# Altium PCB PCB1.PcbDoc
Units mil, origin at the board's own origin, x right, y up, seen from the top; angles counter-clockwise.
Board outline 6960 x 4750 mil, 4 copper layers (Top Layer 1, Top Layer, Bottom Layer, Bottom Layer 1), stack 23.756 mil thick; 113 components, 62 nets, 306 pads, 50 vias.
Unrouted connection lines stored in the file: 48.
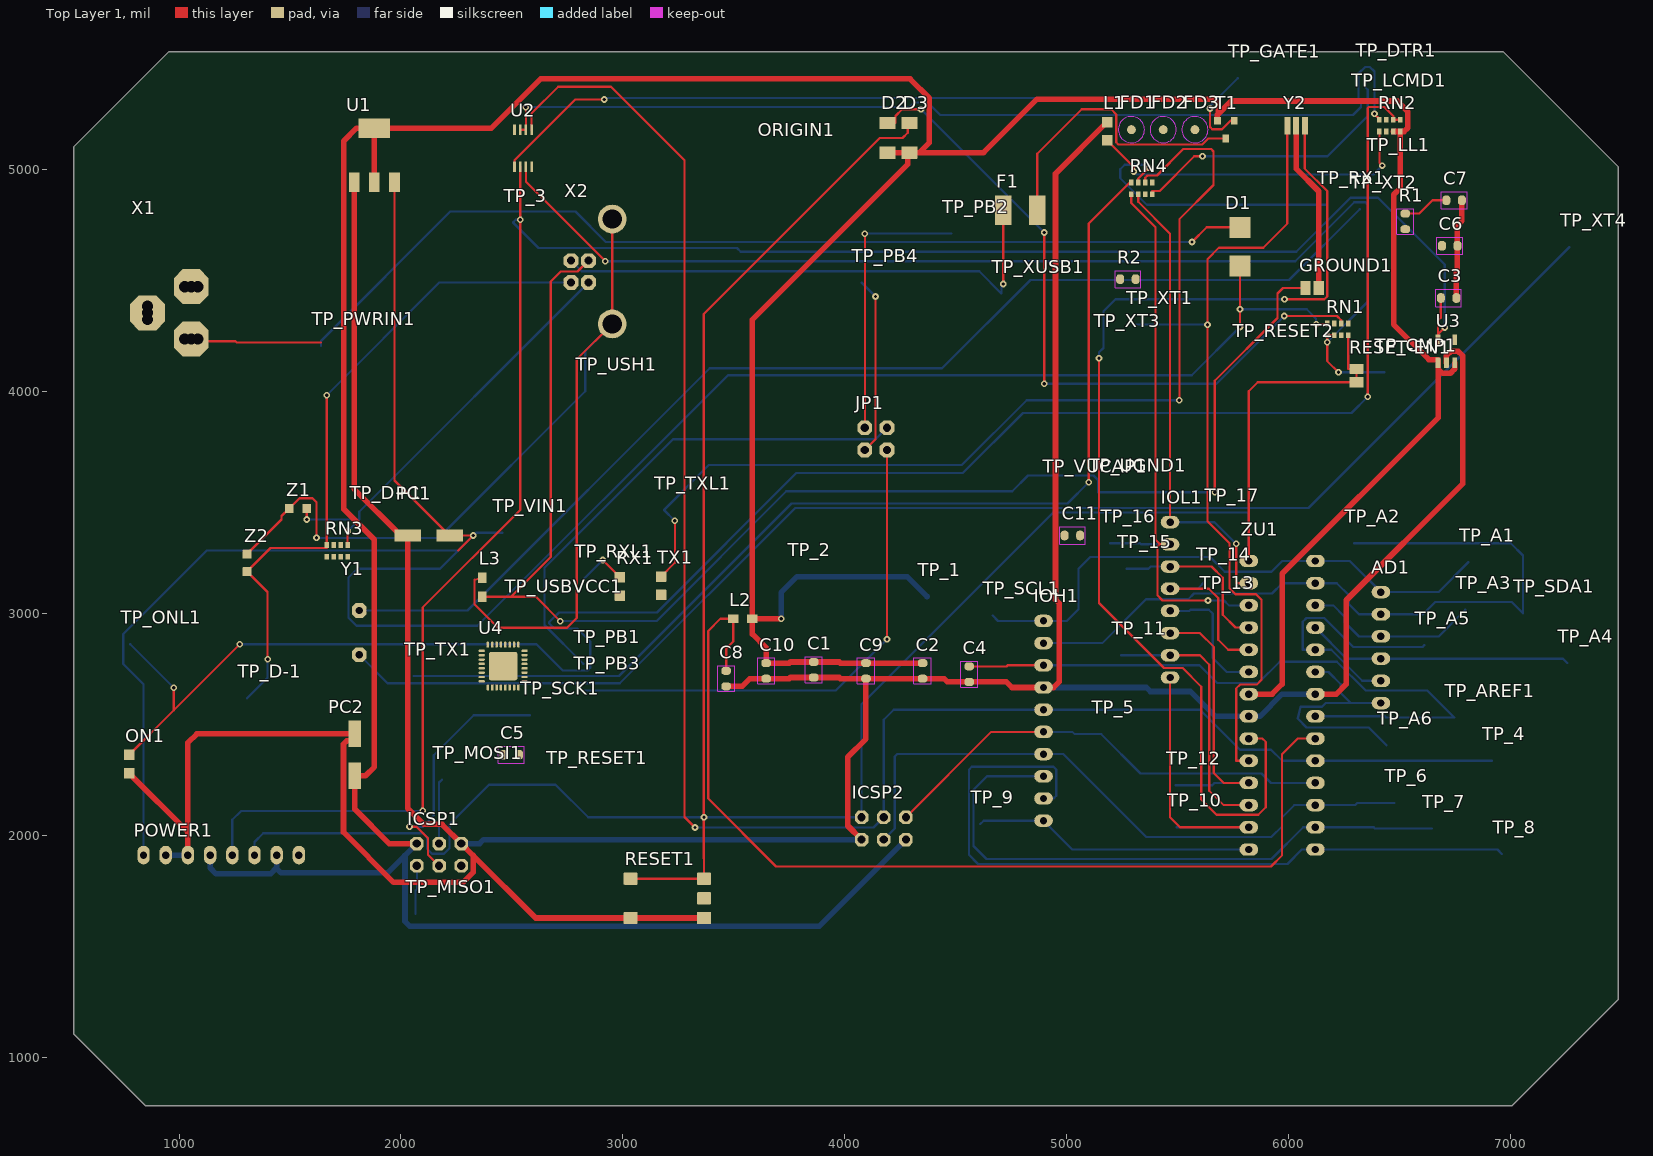
[diagram p0: Top Layer 1 view]
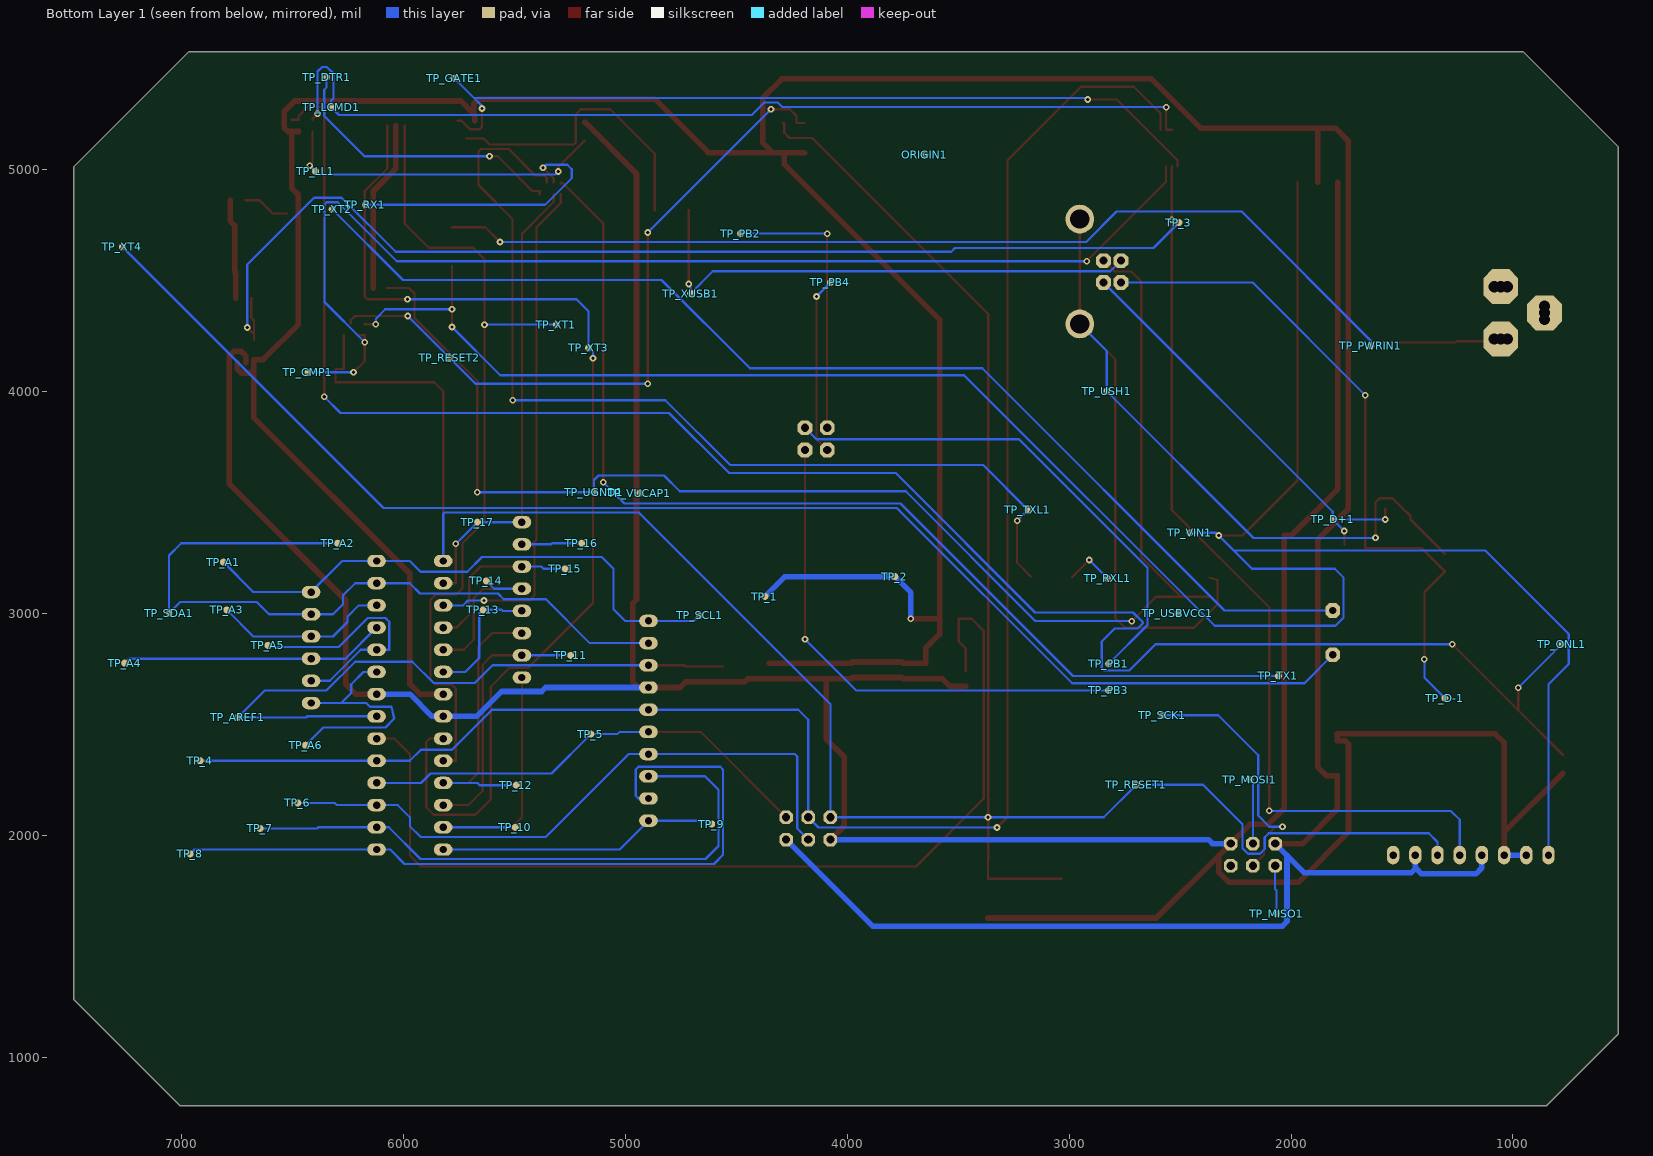
[diagram p1: Bottom Layer 1 view, seen from below]
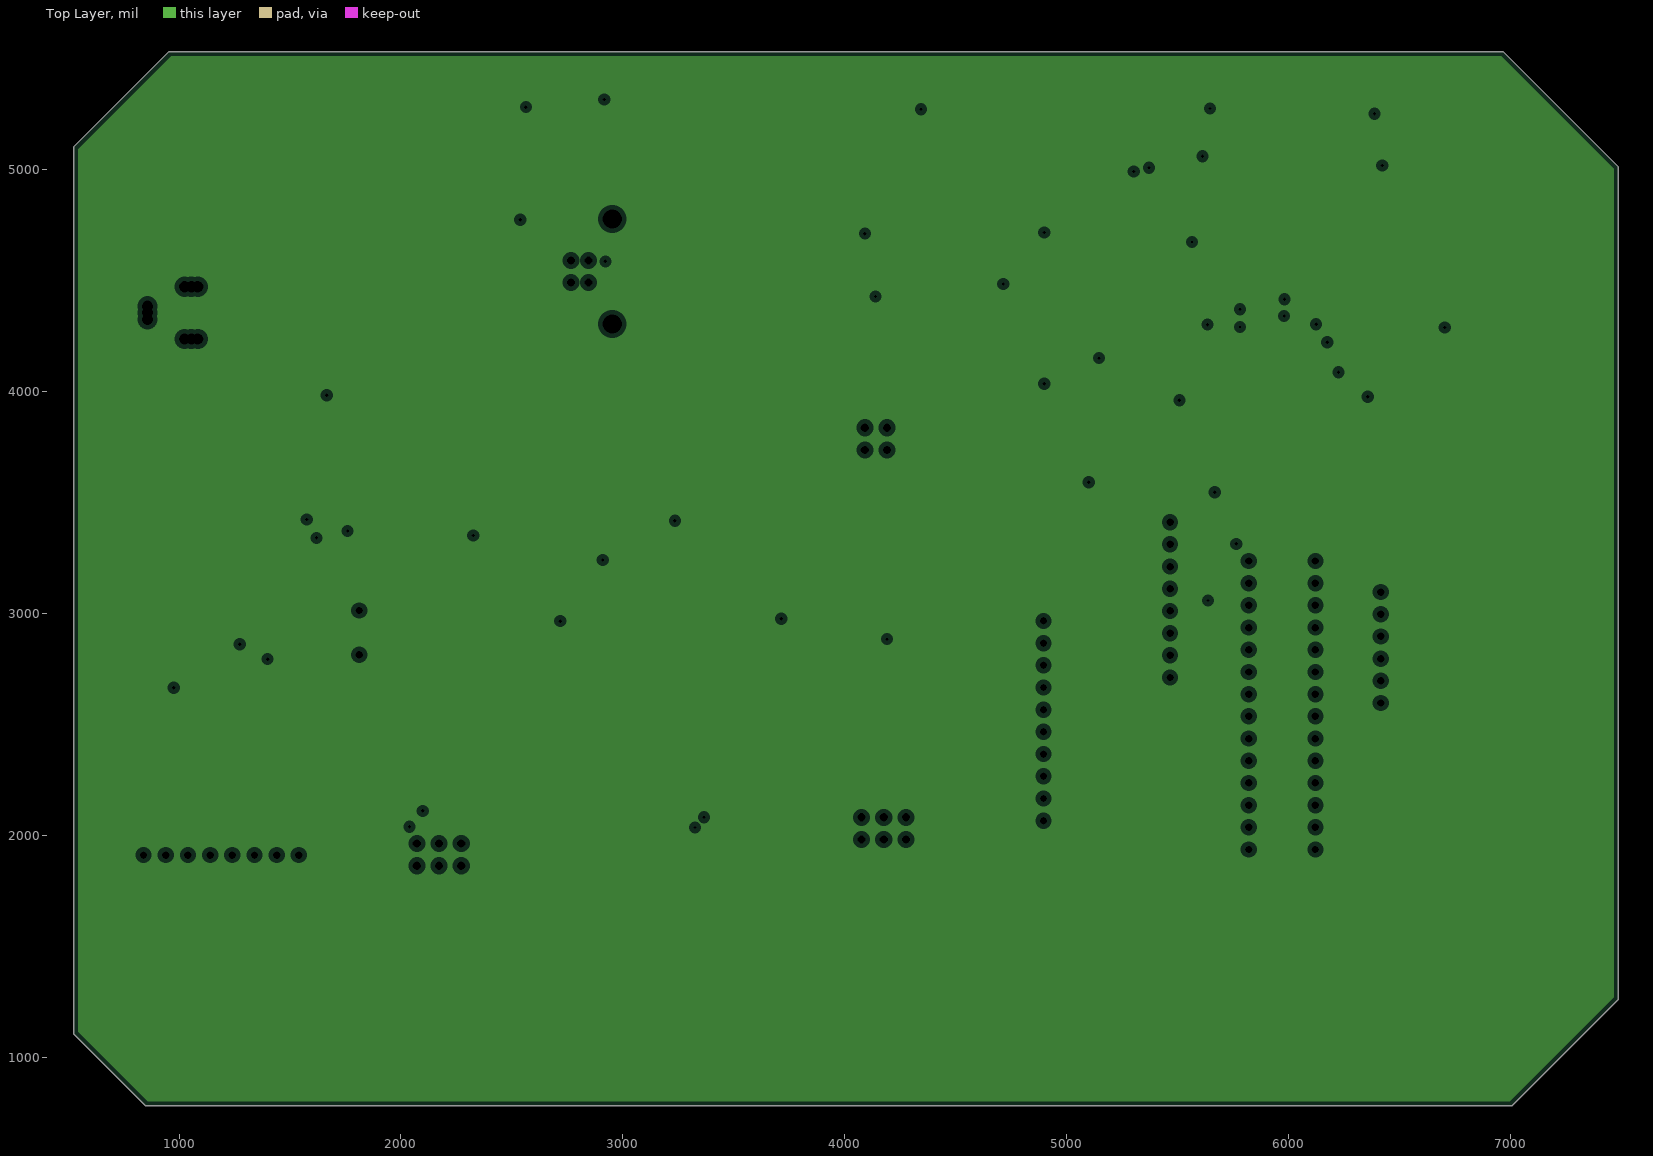
[diagram p2: Top Layer, clearances drawn from the general rule]
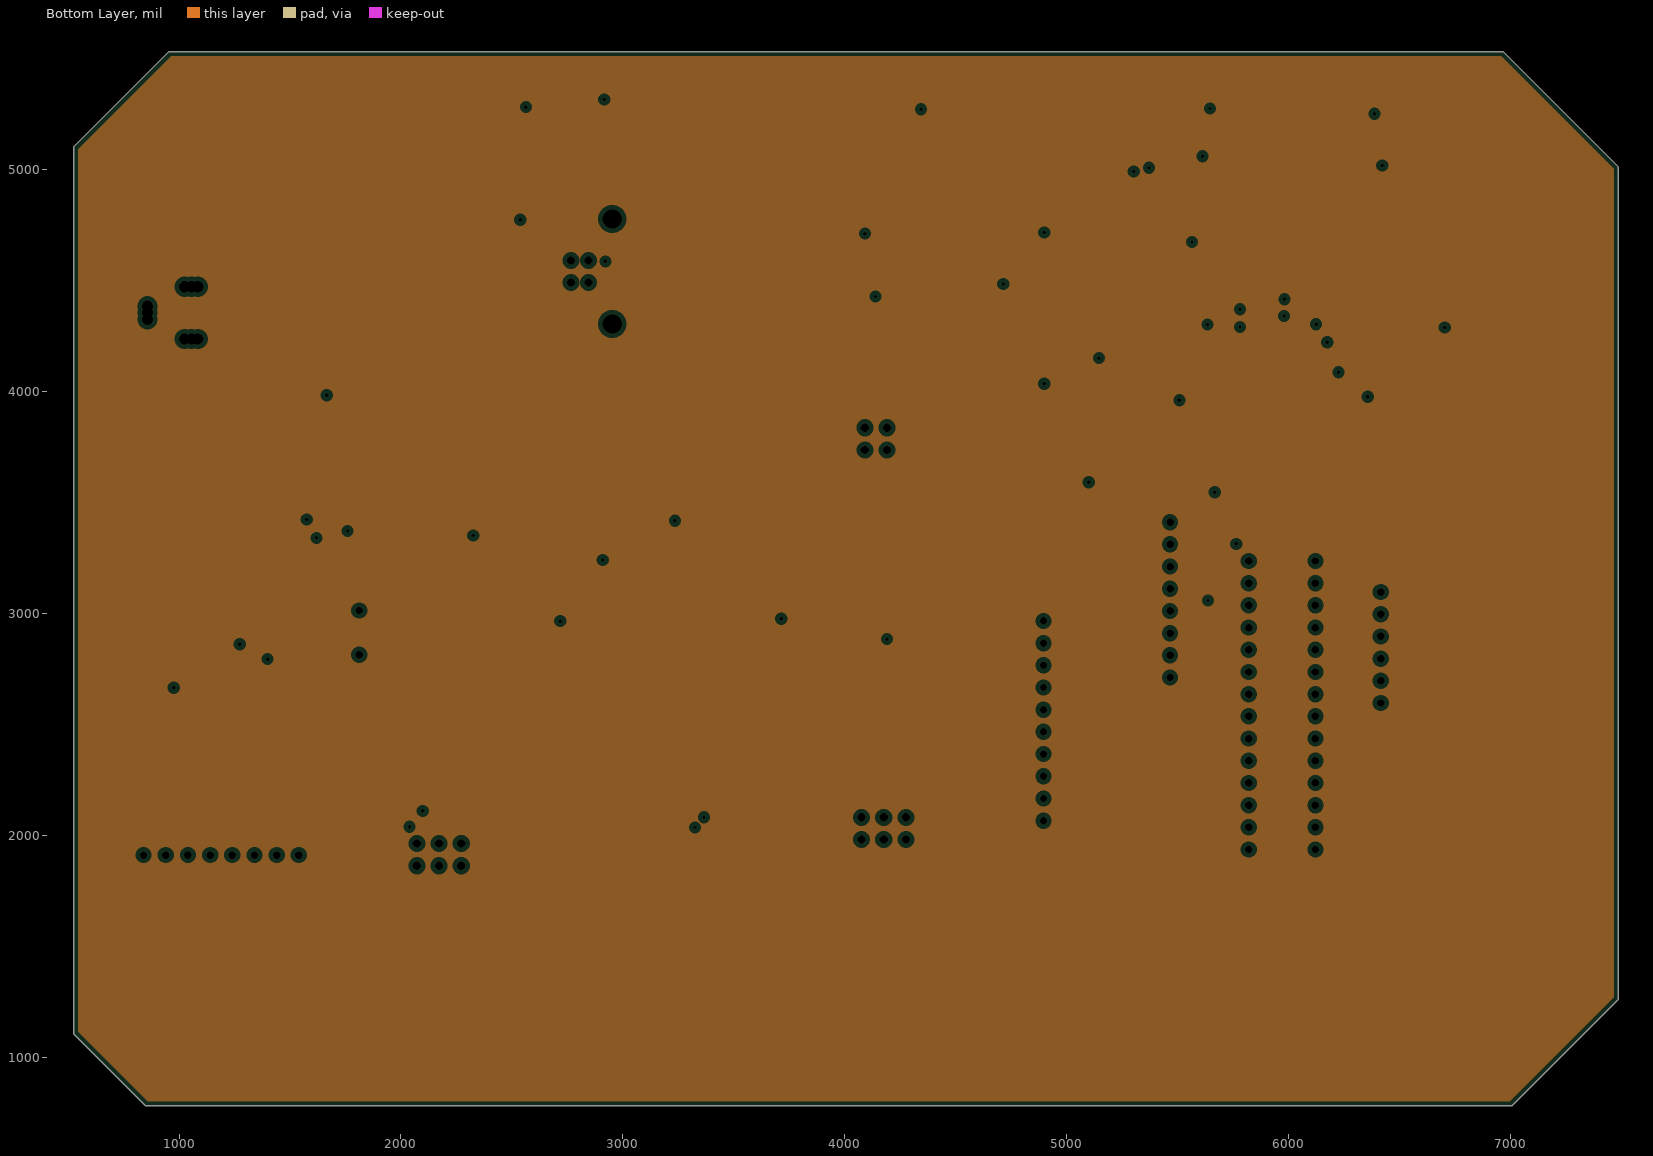
[diagram p3: Bottom Layer, clearances drawn from the general rule]

## Layer stack, top to bottom
Top Solder: solder mask 0.4, Solder Resist, Dk 3.5
Top Layer 1: signal copper 1.378
Dielectric 2: prepreg 2.8, PP-006, Dk 4.1
Top Layer: plane copper 1.4
Dielectric 1: dielectric 12.6, FR-4, Dk 4.8
Bottom Layer: plane copper 1.4
Dielectric 3: prepreg 2.8, PP-006, Dk 4.1
Bottom Layer 1: signal copper 1.378
Bottom Solder: solder mask 0.4, Solder Resist, Dk 3.5

## Board outline
850,780 525,1105 525,5100 955,5530 6965,5530 7485,5010 7485,1260 7005,780

## Design rules (kind name [scope] priority, off if disabled: settings)
Clearance [All] p1: gap=10 ignorepadtopadclearanceinfootprint=FALSE
PlaneClearance [All] p1: clearance=20
PlaneConnect [All] p1: planeconnectstyle=Relief reliefexpansion=20 reliefentries=4 reliefconductorwidth=10 reliefairgap=10
PolygonConnect [All] p1: connectstyle=Relief reliefconductorwidth=10 reliefentries=4 polygonreliefangle="90 Angle" airgapwidth=10
RoutingVias [All] p1: holewidth=15 width=30 viastyle="Through Hole" minholewidth=12 minwidth=24 maxholewidth=28 maxwidth=50
SolderMaskExpansion [All] p1: expansion=4 istentingtop=FALSE
SupplyNets "Schematic Supply Nets_1" [InNet('+5V')] p1: voltage=0.000
SupplyNets "Schematic Supply Nets" [InNet('GND')] p2: voltage=0.000
Width GND [InNet('GND')] p1: maxlimit=50 minlimit=20 preferedwidth=25 minimp=50.000000 maximp=50.000000 favimp=50.000000
Width Power_withd [InNet('+5V')] p2: maxlimit=50 minlimit=20 preferedwidth=25 minimp=50.000000 maximp=50.000000 favimp=50.000000
Width [All] p3: maxlimit=20 minlimit=10 preferedwidth=10 minimp=50.000000 maximp=50.000000 favimp=50.000000
28 further rules are at their usual default settings.

## Classes and differential pairs
component class Sheet1: AD1 C1 C2 C3 C4 C5 C6 C7 C9 C10 C11 D1 D2 F1 FD1 FD2 GROUND1 ICSP1 IOH1 IOL1 JP1 L1 L2 L3 ON1 ORIGIN1 PC2 POWER1 R1 RESET1 RESET-EN1 RN1 RN2 RN4 RX1 T1 TP_1 TP_2 TP_3 TP_4 TP_5 TP_6 TP_7 TP_8 TP_9 TP_10 TP_11 TP_12 TP_13 TP_14 TP_15 TP_16 TP_A1 TP_A2 TP_A4 TP_A5 TP_A6 TP_AREF1 TP_CMP1 TP_D+1 TP_D-1 TP_DTR1 TP_GATE1 TP_LCMD1 TP_LL1 TP_MISO1 TP_MOSI1 TP_ONL1 TP_PB1 TP_PB2 TP_PB3 TP_PWRIN1 TP_RESET1 TP_RESET2 TP_RX1 TP_RXL1 TP_SCK1 TP_SCL1 TP_SDA1 TP_TX1 TP_TXL1 TP_UGND1 TP_USBVCC1 TP_USH1 TP_VIN1 TP_VUCAP1 TP_XT1 TP_XT2 TP_XT4 TP_XUSB1 TX1 U1 U2 U4 X2 Y2 Z1 ZU1

## Components (designator, comment, footprint, x,y, rotation, side; value= is the part's Value field where it differs from the comment)
AD1 "6x1F-H8.5" 1X06 6415,2845 r90 top
C1 "100n" C0603-ROUND 3860,2745 r90 top
C2 "100n" C0603-ROUND 4350,2740 r90 top
C3 "1u" C0603-ROUND 6720,4420 r180 top
C4 "100n" C0603-ROUND 4560,2725 r90 top
C5 "100n" C0603-ROUND 2496.62,2361.93 r0 top
C6 "22p" C0603-ROUND 6725,4655 r0 top
C7 "22p" C0603-ROUND 6745,4860 r0 top
C8 "100n" C0603-ROUND 3465,2705 r90 top
C9 "100n" C0603-ROUND 4095,2740 r90 top
C10 "100n" C0603-ROUND 3645,2740 r270 top
C11 "1u" C0603-ROUND 5025,3350 r0 top
D1 "M7" SMB 5780,4651.61 r90 top
D2 "CD1206-S01575" MINIMELF 4191.91,5141.51 r90 top
D3 "CD1206-S01575" MINIMELF 4290.78,5141.51 r90 top
F1 "MF-MSMF050-2 500mA" L1812 4790,4815 r180 top
FD1 "FIDUCIALMOUNT" FIDUCIA-MOUNT 5290.93,5178.44 r0 top
FD2 "FIDUCIALMOUNT" FIDUCIA-MOUNT 5434.05,5178.44 r0 top
FD3 "FIDUCIALMOUNT" FIDUCIA-MOUNT 5577.16,5178.44 r0 top
GROUND1 "SJ" SJ 6105,4465 r180 top
ICSP1 "3x2 M" 2X03 2171.62,1911.93 r0 top
ICSP2 "3x2 M" 2X03 4175,2030 r180 top
IOH1 "10x1F-H8.5" 1X10 4895,2515 r90 top
IOL1 "8x1F-H8.5" 1X08 5465,3060 r270 top
JP1 "2x2 M - NM" 2X02 4140,3785 r90 top
L1 "YELLOW" CHIP-LED0805 5181.74,5171.04 r0 top
L2 "10uH" 0805 3540,2975 r180 top
L3 "BLM21" 0805 2366.62,3116.93 r90 top
ON1 "GREEN" CHIP-LED0805 775,2320 r180 top
ORIGIN1 "TP_SP" TP-SP 3650,5065 r90 top
PC1 "47u" PANASONIC_D 2125,3350 r0 top
PC2 "47u" PANASONIC_D 1791.62,2361.93 r270 top
POWER1 "8x1F-H8.5" 1X08 1190,1910 r180 top
R1 "1M" R0603-ROUND 6525,4765 r270 top
R2 "1M" R0603-ROUND 5275,4505 r0 top
RESET1 "TS42031-160R-TR-7260" TS42 3200,1715 r180 top
RESET-EN1 "SJ" SJ 6305,4070 r90 top
RN1 "10K" CAY16 6220.75,4278.43 r0 top
RN2 "1K" CAY16 6455.45,5196.64 r0 top
RN3 "22R" CAY16 1712.37,3280.36 r0 top
RN4 "1K" CAY16 5337.24,4913.43 r0 top
RX1 "YELLOW" CHIP-LED0805 2986.62,3120.59 r180 top
T1 "FDN340P" SOT-23 5715.23,5178.5 r0 top
TP_1 "TP_SP" TP-SP 4370,3075 r90 top
TP_2 "TP_SP" TP-SP 3785,3165 r90 top
TP_3 "TP_SP" TP-SP 2505,4760 r90 top
TP_4 "TP_SP" TP-SP 6915,2335 r90 top
TP_5 "TP_SP" TP-SP 5155,2455 r90 top
TP_6 "TP_SP" TP-SP 6475,2145 r90 top
TP_7 "TP_SP" TP-SP 6645,2030 r90 top
TP_8 "TP_SP" TP-SP 6960,1915 r90 top
TP_9 "TP_SP" TP-SP 4610,2050 r90 top
TP_10 "TP_SP" TP-SP 5495,2035 r90 top
TP_11 "TP_SP" TP-SP 5245,2810 r90 top
TP_12 "TP_SP" TP-SP 5490,2225 r90 top
TP_13 "TP_SP" TP-SP 5640,3015 r90 top
TP_14 "TP_SP" TP-SP 5625,3145 r90 top
TP_15 "TP_SP" TP-SP 5270,3200 r90 top
TP_16 "TP_SP" TP-SP 5195,3315 r90 top
TP_17 "TP_SP" TP-SP 5665,3410 r90 top
TP_A1 "TP_SP" TP-SP 6810,3230 r90 top
TP_A2 "TP_SP" TP-SP 6295,3315 r90 top
TP_A3 "TP_SP" TP-SP 6795,3015 r90 top
TP_A4 "TP_SP" TP-SP 7255,2775 r90 top
TP_A5 "TP_SP" TP-SP 6610,2855 r90 top
TP_A6 "TP_SP" TP-SP 6440,2405 r90 top
TP_AREF1 "TP_SP" TP-SP 6745,2530 r90 top
TP_CMP1 "TP_SP" TP-SP 6430,4085 r90 top
TP_D+1 "TP_SP" TP-SP 1811.62,3421.93 r90 top
TP_D-1 "TP_SP" TP-SP 1306.62,2616.93 r90 top
TP_DTR1 "TP_SP" TP-SP 6345,5415 r90 top
TP_GATE1 "TP_SP" TP-SP 5770,5410 r90 top
TP_LCMD1 "TP_SP" TP-SP 6325,5280 r90 top
TP_LL1 "TP_SP" TP-SP 6395,4990 r90 top
TP_MISO1 "TP_SP" TP-SP 2065,1645 r90 top
TP_MOSI1 "TP_SP" TP-SP 2185,2250 r90 top
TP_ONL1 "TP_SP" TP-SP 780,2860 r90 top
TP_PB1 "TP_SP" TP-SP 2821.62,2771.93 r90 top
TP_PB2 "TP_SP" TP-SP 4480,4710 r90 top
TP_PB3 "TP_SP" TP-SP 2821.62,2651.93 r90 top
TP_PB4 "TP_SP" TP-SP 4075,4490 r90 top
TP_PWRIN1 "TP_SP" TP-SP 1640,4205 r90 top
TP_RESET1 "TP_SP" TP-SP 2696.62,2226.93 r90 top
TP_RESET2 "TP_SP" TP-SP 5790,4150 r90 top
TP_RX1 "TP_SP" TP-SP 6170,4840 r90 top
TP_RXL1 "TP_SP" TP-SP 2826.62,3156.93 r90 top
TP_SCK1 "TP_SP" TP-SP 2580,2540 r90 top
TP_SCL1 "TP_SP" TP-SP 4665,2990 r90 top
TP_SDA1 "TP_SP" TP-SP 7055,3000 r90 top
TP_TX1 "TP_SP" TP-SP 2056.62,2716.93 r90 top
TP_TXL1 "TP_SP" TP-SP 3185,3465 r90 top
TP_UGND1 "TP_SP" TP-SP 5140,3545 r90 top
TP_USBVCC1 "TP_SP" TP-SP 2510,3000 r90 top
TP_USH1 "TP_SP" TP-SP 2830,4000 r90 top
TP_VIN1 "TP_SP" TP-SP 2456.62,3361.93 r90 top
TP_VUCAP1 "TP_SP" TP-SP 4935,3540 r90 top
TP_XT1 "TP_SP" TP-SP 5310,4300 r90 top
TP_XT2 "TP_SP" TP-SP 6320,4820 r90 top
TP_XT3 "TP_SP" TP-SP 5165,4195 r90 top
TP_XT4 "TP_SP" TP-SP 7265,4650 r90 top
TP_XUSB1 "TP_SP" TP-SP 4705,4440 r90 top
TX1 "YELLOW" CHIP-LED0805 3171.62,3123.27 r180 top
U1 "NCP1117ST50T3G" SOT223 1880,5062.99 r0 top
U2 "LMV358IDGKR" MSOP08 2550,5095 r0 top
U3 "LP2985-33DBVR" SOT23-DBV 6710,4180 r0 top
U4 "ATMEGA16U2-MU(R)" MLF32 2460.16,2761.46 r0 top
X1 "POWERSUPPLY_DC21MMX" POWERSUPPLY_DC-21MM 1058,4485 r0 top
X2 "USB-B_TH" PN61729 2951.69,4539.21 r90 top
Y1 "16MHz" QS 1811.62,2911.93 r90 top
Y2 "CSTCE16M0V53-R0 16MHZ" RESONATOR 6032.88,5196.63 r0 top
Z1 "CG0603MLC-05E" CT/CN0603 1535.99,3471.93 r180 top
Z2 "CG0603MLC-05E" CT/CN0603 1306.62,3226.93 r90 top
ZU1 "ATMEGA328P-PU" DIL28-3 5970,2585 r270 top

## Footprints (in the part's own frame and the unit in brackets; to place one, negate y for a bottom-side part, rotate by r counter-clockwise, add the part's x,y. Pads: shape width x height; smd on the part's side, far side on the other; paste and mask are expansions set on the pad)
1X06 [mil] "1X06"
  oval 56x84 / inner round 0 / far side oval 56x84 hole 33.46: 1(-250,0) 2(-150,0) 3(-50,0) 4(50,0) 5(150,0) 6(250,0)
1X08 [mil] "1X08"
  oval 56x84 / inner round 0 / far side oval 56x84 hole 33.46: 1(-350,0) 2(-250,0) 3(-150,0) 4(-50,0) 5(50,0) 6(150,0) 7(250,0) 8(350,0)
1X10 [mil] "1X10"
  oval 56x84 / inner round 0 / far side oval 56x84 hole 33.46: 1(-450,0) 2(-350,0) 3(-250,0) 4(-150,0) 5(-50,0) 6(50,0) 7(150,0) 8(250,0) 9(350,0) 10(450,0)
2X02 [mil] "2X02"
  oct 66x66 / inner round 0 / far side oct 66x66 hole 37.4: 1(-50,-50) 2(-50,50) 3(50,-50) 4(50,50)
2X03 [mil] "2X03"
  oct 61.02x61.02 / inner round 0 / far side oct 61.02x61.02 hole 37.4: 1(-100,-50) 2(-100,50) 3(0,-50) 4(0,50) 5(100,-50) 6(100,50)
0805 [mm] "0805"
  rrect5% 1.2x1 smd: 1(-1.1,0) 2(1.1,0)
C0603-ROUND [mil] "C0603-ROUND"
  rrect80% 35.37x43.31 smd: 1(-35,0) 2(35,0)
  Top Layer 1 keep-out lines w2: -57.99,38.7 -57.99,-38.7 57.99,-38.7 57.99,38.7 -57.99,38.7
CAY16 [mm] "CAY16"
  rrect10% 0.5x0.65 smd: 1(-1.2,-0.675) 2(-0.4,-0.675) 3(0.4,-0.675) 4(1.2,-0.675) 5(1.2,0.675) 6(0.4,0.675) 7(-0.4,0.675) 8(-1.2,0.675)
CHIP-LED0805 [mil] "CHIP-LED0805"
  rrect4% 47.24x47.24 smd: A(0,-41.34) C(0,41.34)
CT/CN0603 [mm] "CT/CN0603"
  rrect5% 1x1 smd: 1(-1,0) 2(1,0)
DIL28-3 [mil] "DIL28-3"
  oval 56x84 / inner round 0 / far side oval 56x84 hole 33.46: 1(-650,-150) 2(-550,-150) 3(-450,-150) 4(-350,-150) 5(-250,-150) 6(-150,-150) 7(-50,-150) 8(50,-150) 9(150,-150) 10(250,-150) 11(350,-150) 12(450,-150) 13(550,-150) 14(650,-150) 15(650,150) 16(550,150) 17(450,150) 18(350,150) 19(250,150) 20(150,150) 21(50,150) 22(-50,150) 23(-150,150) 24(-250,150) 25(-350,150) 26(-450,150) 27(-550,150) 28(-650,150)
FIDUCIA-MOUNT [mil] "FIDUCIA-MOUNT"
  rrect100% 40x40 smd: P$1(0,0)
  Top Layer 1 keep-out circle w5: c0,0 r59.06
L1812 [mil] "L1812"
  rrect2% 74.8x133.86 smd: 1(-76.77,0) 2(76.77,0)
MINIMELF [mil] "MINIMELF"
  rrect3% 55.12x70.87 smd: A(66.93,0) C(-66.93,0)
MLF32 [mil] "MLF32"
  rrect80% 27.56x11.02 smd: 1(-96.46,68.9) 2(-96.46,49.21) 3(-96.46,29.53) 4(-96.46,9.84) 5(-96.46,-9.84) 6(-96.46,-29.53) 7(-96.46,-49.21) 8(-96.46,-68.9) 17(96.46,-68.9) 18(96.46,-49.21) 19(96.46,-29.53) 20(96.46,-9.84) 21(96.46,9.84) 22(96.46,29.53) 23(96.46,49.21) 24(96.46,68.9)
  rrect80% 11.02x27.56 smd: 9(-68.9,-96.46) 10(-49.21,-96.46) 11(-29.53,-96.46) 12(-9.84,-96.46) 13(9.84,-96.46) 14(29.53,-96.46) 15(49.21,-96.46) 16(68.9,-96.46) 25(68.9,96.46) 26(49.21,96.46) 27(29.53,96.46) 28(9.84,96.46) 29(-9.84,96.46) 30(-29.53,96.46) 31(-49.21,96.46) 32(-68.9,96.46)
  rrect15% 128.11x128.11 smd paste+0 mask+0: 33(0,0)
MSOP08 [mil] "MSOP08"
  rrect16% 11.81x47.24 smd: 1(-38.43,-83.19) 2(-12.83,-83.19) 3(12.76,-83.19) 4(38.35,-83.19) 5(38.35,83.15) 6(12.76,83.15) 7(-12.83,83.15) 8(-38.43,83.15)
PANASONIC_D [mm] "PANASONIC_D"
  rrect3% 3x1.4 smd: +(2.4,0) -(-2.4,0)
PN61729 [mil] "PN61729"
  oct 66x66 / inner round 0 / far side oct 66x66 hole 37.4: 1(49.21,185.43) 2(-49.21,185.43) 3(-49.21,106.69) 4(49.21,106.69)
  round 129.91 / inner round 0 / far side round 129.91 hole 86.61: P$1(-236.22,0) P$2(236.22,0)
POWERSUPPLY_DC-21MM [mil] "POWERSUPPLY_DC-21MM"
  oct 157.48x157.48 / inner round 0 / far side oct 157.48x157.48 hole 51.18: 1(-200,-132) 2(-3,-250) 3(-3,-14)
  round 76.77 / inner round 0 / far side round 76.77 hole 51.18: 4(-200,-162) 5(-200,-102) 6(-33,-14) 7(27,-14) 8(-33,-250) 9(27,-250)
QS [mil] "QS"
  oct 66x66 / inner round 0 / far side oct 66x66 hole 33.46: 1(-100,0) 2(100,0)
R0603-ROUND [mil] "R0603-ROUND"
  rrect80% 35.37x43.31 smd: 1(-35,0) 2(35,0)
  Top Layer 1 keep-out lines w2: 57.99,-38.7 -57.99,-38.7 -57.99,38.7 57.99,38.7 57.99,-38.7
RESONATOR [mm] "RESONATOR"
  rrect7% 0.7x2 smd: 1(-1,0) 2(0,0) 3(1,0)
SJ [mil] "SJ"
  rrect4% 46x63 smd: 1(-30,0) 2(30,0)
SMB [mil] "SMB"
  rrect2% 94.49x94.49 smd: A(86.61,0) C(-86.61,0)
SOT23-DBV [mil] "SOT23-DBV"
  rrect9% 21.65x47.24 smd: 1(-37.4,-51.18) 2(0,-51.18) 3(37.4,-51.18) 4(37.4,51.18) 5(-37.4,51.18)
SOT223 [mil] "SOT223"
  rrect4% 48x88 smd: 1(-91,-122) 2(0,-122) 3(91,-122)
  rrect2% 141.73x86.61 smd: 4(0,122.01)
SOT-23 [mil] "SOT-23"
  rrect6% 31x35 smd: 1(1,-40) 2(-37,40) 3(39,40)
TP-SP [mil] "TP-SP"
  rrect100% 31.5x31.5 smd far side paste+0: X(0,0)
TS42 [mil] "TS42"
  rrect15% 62.99x55.12 smd: 1(-165.35,88.58) 2(165.35,88.58) 3(-165.35,-88.58) 4(165.35,-88.58)
  rrect15% 62.99x55.12 smd paste+0: 5(-165.35,0)

## Part data
AD1: library part PINHD-1X6, "PIN HEADER", DeviceSetName=PINHD-1X6, GateName_1=A, LibraryName=SmartPrj, SymbolName_1=PINHD6
C1 C2 C3 C4 C5 C6 C7 C8 C9 C10 C11: library part C-EU0603-RND, "CAPACITOR, European symbol", DeviceName=0603-RND, DeviceSetName=C-EU, GateName_1=G$1, LibraryName=SmartPrj, SymbolName_1=C-EU
D1: library part DIODE-SMB, "DIODE", DeviceName=SMB, DeviceSetName=DIODE-, GateName_1=G$1, LibraryName=diode, SymbolName_1=D
D2 D3: library part DIODE-MINIMELF, "DIODE", DeviceName=MINIMELF, DeviceSetName=DIODE-, GateName_1=G$1, LibraryName=diode, SymbolName_1=D
F1: library part L-EUL1812, "INDUCTOR, European symbol", DeviceName=L1812, DeviceSetName=L-EU, GateName_1=G$1, LibraryName=rcl, SymbolName_1=L-EU
GROUND1 RESET-EN1: "SMD solder JUMPER", DeviceSetName=SJ, GateName_1=1, LibraryName=jumper, SymbolName_1=SJ
ICSP1 ICSP2: library part PINHD-2X3, "PIN HEADER", DeviceSetName=PINHD-2X3, GateName_1=A, LibraryName=SmartPrj, SymbolName_1=PINH2X3
IOH1: library part PINHD-1X10_ARD, "PIN HEADER", DeviceSetName=PINHD-1X10_ARD, GateName_1=A, LibraryName=SmartPrj, SymbolName_1=PINHD10
IOL1 POWER1: library part PINHD-1X8, "PIN HEADER", DeviceSetName=PINHD-1X8, GateName_1=A, LibraryName=SmartPrj, SymbolName_1=PINHD8
JP1: library part PINHD-2X2, "PIN HEADER", DeviceSetName=PINHD-2X2, GateName_1=A, LibraryName=SmartPrj, SymbolName_1=PINH2X2
L1 ON1 RX1 TX1: library part LEDCHIP-LED0805, "LED   OSRAM: - CHIPLED LG R971, LG N971, LY N971, LG Q971, LY Q971, LO R971, LY R971 LH N974, LH R974 LS Q976, LO Q976, LY Q976 LO Q996 - Hyper CHIPLED LW Q18S LB Q993, LB Q99A, LB R99A - SideLED LS A670, LO A670, LY A670, LG A670, LP A670 LB A673, LV A673, LT A673, LW A673 LH A674 LY A675 LS A676, LA A676, LO A676, LY A676, LW A676 LS A679, LY A679, LG A679 -  Hyper Micro SIDELEDÂ® LS Y876, LA Y876, LO Y876, LY Y876 LT Y87S - SmartLED LW L88C, LW L88S LB L89C, LB L89S, LG L890 LS L89K, LO L89K, LY L89K LS L896, LA L896, LO L896, LY L896 - TOPLED LS T670, LO T670, LY T670, LG T670, LP T670 LSG T670, LSP T670, LSY T670, LOP T670, LYG T670 LG T671, LOG T671, LSG T671 LB T673, LV T673, LT T673, LW T673 LH T674 LS T676, LA T676, LO T676, LY T676, LB T676, LH T676, LSB T676, LW T676 LB T67C, LV T67C, LT T67C, LS T67K, LO T67K, LY T67K, LW E67C LS E67B, LA E67B, LO E67B, LY E67B, LB E67C, LV E67C, LT E67C LW T67C LS T679, LY T679, LG T679 LS T770, LO T770, LY T770, LG T770, LP T770 LB T773, LV T773, LT T773, LW T773 LH T774 LS E675, LA E675, LY E675, LS T675 LS T776, LA T776, LO T776, LY T776, LB T776 LHGB T686 LT T68C, LB T68C - Hyper Mini TOPLEDÂ® LB M676 - Mini TOPLED SantanaÂ® LG M470 LS M47K, LO M47K, LY M47K    Source: http://www.osram.convergy.de   LUXEON: - LUMILEDÂ® LXK2-PW12-R00, LXK2-PW12-S00, LXK2-PW14-U00, LXK2-PW14-V00 LXK2-PM12-R00, LXK2-PM12-S00, LXK2-PM14-U00 LXK2-PE12-Q00, LXK2-PE12-R00, LXK2-PE12-S00, LXK2-PE14-T00, LXK2-PE14-U00 LXK2-PB12-K00, LXK2-PB12-L00, LXK2-PB12-M00, LXK2-PB14-N00, LXK2-PB14-P00, LXK2-PB14-Q00 LXK2-PR12-L00, LXK2-PR12-M00, LXK2-PR14-Q00, LXK2-PR14-R00 LXK2-PD12-Q00, LXK2-PD12-R00, LXK2-PD12-S00 LXK2-PH12-R00, LXK2-PH12-S00 LXK2-PL12-P00, LXK2-PL12-Q00, LXK2-PL12-R00    Source: www.luxeon.com   KINGBRIGHT:   KA-3528ASYC Source: www.kingbright.com", DeviceName=CHIP-LED0805, DeviceSetName=LED, GateName_1=G$1, LibraryName=led, SymbolName_1=LED
L2: library part 0715_CV201210-100K, "10uH 0805", CASE=0805, DeviceSetName=0715_CV201210-100K, GateName_1=G$1, LibraryName=Induttanze, MONTHLY_USAGE=_____, PART_NUMBER=CV201210-100K, PRICE=_____, SUPPLIER=_____, SymbolName_1=L, TYPE=Induttanze
L3: library part WE-CBF_0805, "SMD EMI Suppression Ferrite Beads - excellent anti-EMI properties - low DCR - impedances till 3000 ohms - rated current up to 6 A", DeviceName=_0805, DeviceSetName=WE-CBF, GateName_1=G$1, LibraryName=wuerth-elektronik, SymbolName_1=L
PC1 PC2: library part CPOL-EUD, "POLARIZED CAPACITOR, European symbol", +=+, DeviceName=D, DeviceSetName=CPOL-EU, GateName_1=G$1, LibraryName=rcl, SymbolName_1=CPOL
R1 R2: library part R-EU_R0603, "RESISTOR, European symbol", DeviceName=R0603, DeviceSetName=R-EU_, GateName_1=G$1, LibraryName=SmartPrj, SymbolName_1=R-EU
RESET1: library part TS42, "TS42 Dongnan Electronics Tact switch VDC 12V - 50mA", DeviceSetName=TS42, GateName_1=G$1, LibraryName=SmartPrj, SymbolName_1=ST-MOD_V1.4_TS42
RN1 RN2 RN3 RN4: library part 4R-NCAY16, "Array Chip Resistor   Source: RS Component / Phycomp", DeviceName=CAY16, DeviceSetName=4R-N, GateName_1=A, GateName_2=B, GateName_3=C, GateName_4=D, LibraryName=resistor-dil, SymbolName_1=R1NV, SymbolName_2=R1NV, SymbolName_3=R1NV, SymbolName_4=R1NV
T1: library part PMOSSOT23, "MOS FET", DeviceSetName=PMOSSOT23, GateName_1=A, LibraryName=zetex, SymbolName_1=P_MOSFET
U1: library part MC33269ST*, "Adjustable Output Low Dropout Voltage Regulator 800 mA   Source: http://www.onsemi.com/pub/Collateral/MC33269-D.PDF", DeviceSetName=MC33269ST*, GateName_1=G$1, LibraryName=linear, SymbolName_1=VREG-O2
U2: library part LMV358?*MM, "Dual General Purpose, Low Voltage, Rail-to-Rail Output Operational Amplifiers   Source: http://www.national.com/mpf/LM/LMV321.html http://www.national.com/dt/lmv_qual.pdf", DeviceName=MM, DeviceSetName=LMV358?*, GateName_1=A, GateName_2=B, GateName_3=P, LibraryName=linear, SymbolName_1=OPAMP, SymbolName_2=OPAMP, SymbolName_3=PWR+-, V+=V+, V-=V-
U3: library part LP2985-XXDBVR, "ULTRALOW-POWER 50-mA LOW-DROPOUT LINEAR REGULATORS   50-mA Low-Dropout Regulator Source: http://focus.ti.com/lit/ds/symlink/tps77001.pdf", DeviceSetName=LP2985-XXDBVR, GateName_1=G$1, LibraryName=SmartPrj, SymbolName_1=LP2985-XXDBVR
U4: library part ATMEGA16U2-MU, DeviceName=MU, DeviceSetName=ATMEGA16U2-, GateName_1=G$1, LibraryName=SmartPrj, SymbolName_1=ATMEL_MEGA8U2
X2: library part PN61729, "BERG USB connector", DeviceSetName=PN61729, GateName_1=G$1, LibraryName=SmartPrj, SymbolName_1=J11, USB=USB
Y1: library part XTAL/S, "CRYSTAL", DeviceSetName=XTAL/S, GateName_1=G$1, LibraryName=SmartPrj, SymbolName_1=XTAL
Y2: library part RESONATORMU, DeviceName=MU, DeviceSetName=RESONATOR, GateName_1=G$1, LibraryName=SmartPrj, SymbolName_1=RESONATOR
Z1 Z2: library part VARISTORCN0603, "VARISTOR", DeviceName=CN0603, DeviceSetName=VARISTOR, GateName_1=G$1, LibraryName=varistor, SymbolName_1=VARISTOR
ZU1: "MICROCONTROLLER   4 Kbytes FLASH   128 bytes SRAM   256 bytes EEPROM   UART   6-channel 10 bit ADC", DeviceName=PU, DeviceSetName=ATMEGA328P-, GateName_1=G$1, LibraryName=SmartPrj, SymbolName_1=20-I/O-2
FD1 FD2 FD3: DeviceSetName=FIDUCIALMOUNT, GateName_1=G$1, LibraryName=SmartPrj, SymbolName_1=FIDUCIAL
ORIGIN1 TP_1 TP_2 TP_3 TP_4 TP_5 TP_6 TP_7 TP_8 TP_9 TP_10 TP_11 TP_12 TP_13 TP_14 TP_15 TP_16 TP_17 TP_A1 TP_A2 TP_A3 TP_A4 TP_A5 TP_A6 TP_AREF1 TP_CMP1 TP_D+1 TP_D-1 TP_DTR1 TP_GATE1 TP_LCMD1 TP_LL1 TP_MISO1 TP_MOSI1 TP_ONL1 TP_PB1 TP_PB2 TP_PB3 TP_PB4 TP_PWRIN1 TP_RESET1 TP_RESET2 TP_RX1 TP_RXL1 TP_SCK1 TP_SCL1 TP_SDA1 TP_TX1 TP_TXL1 TP_UGND1 TP_USBVCC1 TP_USH1 TP_VIN1 TP_VUCAP1 TP_XT1 TP_XT2 TP_XT3 TP_XT4 TP_XUSB1: DeviceSetName=TP_SP, GateName_1=G$1, LibraryName=SmartPrj, SymbolName_1=TP-SP
X1: DeviceName=X, DeviceSetName=POWERSUPPLY_DC21MM, GateName_1=G$1, LibraryName=SmartPrj, SymbolName_1=POWERSUPPLY_DC21PWR

## Via types
v1: diameter 30, hole 15, Top Layer 1 to Bottom Layer 1, 50 vias

## Nets (pads, with @x,y where several pads share a name; then routed paths per layer and width w, separated by ;. In a path a pad name is that pad's centre, name@x,y a point inside that pad or via, vN(x,y) a via of type N, cw(c..) or ccw(c..) an arc to the next point about the centre after c; other vN are vias at no path point)
+3V3: C3.2 POWER1.4 TP_3.X U2.2 U3.5 | length 9154.1
  Top Layer 1 w10: v1(2098,2109) 2098,3026 2537.17,3465.17 v1(2537.17,4772) U2.2 ; U3.5 6672.6,4256.6 ; C3.2 6685,4331.4 6672.6,4319 6672.6,4256.6 ; v1(6703,4287) 6672.6,4256.6
  Bottom Layer 1 w10: POWER1.4 1240,2069 1280,2109 v1(2098,2109) ; v1(2537.17,4772) 2517,4772 TP_3.X 2620,4645 3514,4645 3531,4628 6034,4628 6277.55,4871.55 6401.91,4871.55 6703,4570.45 v1(6703,4287)
+5V: C1.2 C2.2 C9.2 C10.1 D2.C D3.C ICSP1.2 ICSP2.2 L2.1 PC2.+ POWER1.2 POWER1.5 RN1.3 RN1.5 RN2.2 RN2.3 RN2.4 RN4.3 T1.2 TP_1.X TP_2.X U1.2 U1.4 U2.8 U3.1 U3.3 U4.4 U4.32 ZU1.7 | length 20847.3
  Top Layer 1 w25: U1.2 U1.4 ; ICSP1.2 1946.59,1961.93 1791.62,2116.9 PC2.+ 1840,2267.44 1880,2307.44 1880,3330.59 1742,3468.59 1742,5127 1800,5185 U1.4 ; v1(3713,2975) L2.1 ; D2.C D3.C@4283,5074.58 ; C2.2 C9.2 3980,2775 3975,2780 C1.2 3755,2780 3750,2775 C10.1 3645,2844 3583.31,2905.69 L2.1 ; T1.2 5678.23,5245 ; ZU1.7 5925,2635 5970,2680 5970,3177.4 6672.6,3880 6672.6,4100 ; RN2.3 RN2.4 ; U3.3 6747.4,4100 6727.4,4080 6692.6,4080 6672.6,4100 ; U1.4 2407,5185 2629,5407 4294,5407 4381,5320 4381,5120 4335.58,5074.58 ; L2.1 3583.31,4322.31 4283,5022 D3.C@4283,5074.58 ; D3.C@4283,5074.58 D3.C 4335.58,5074.58 ; 4335.58,5074.58 4624.58,5074.58 4866,5316 5660,5316 5683,5293 5683,5250 ; 5678.23,5245 5678.23,5245.23 5683,5250 ; 5678.23,5245 5683,5249.77 5683,5250 ; 5683,5250 5740.5,5307.5 6488.5,5307.5 6536,5260 6536,5186.07 6520,5170.07 RN2.4 ; RN2.4 6502.69,4915.69 6472,4885 6472,4301 6631,4142 6672.6,4142 U3.1 6672.6,4100
  Bottom Layer 1 w25: POWER1.5 1140,1853 1167.5,1825.5 1412.5,1825.5 1440,1853 ; POWER1.2 1440,1853 ; ICSP1.2 2018,1908.31 ; v1(3713,2975) 3713,3093 TP_2.X 4280,3165 TP_1.X ; ICSP2.2 3884,1589 2040,1589 2018,1611 2018,1908.31 ; 1440,1853 1440,1850 1460,1830 1939.69,1830 2018,1908.31
AD0: AD1.1 TP_A6.X ZU1.23 | length 1113.7
  Bottom Layer 1 w10: ZU1.23 6179,2735 6234,2680 6234,2640 6279,2595 ; AD1.1 6279,2595 ; TP_A6.X 6360,2485 6080,2485 6040,2525 6053,2578 6150,2578 6167,2595 6279,2595
AD1: AD1.2 TP_A5.X ZU1.24 | length 1147.6
  Bottom Layer 1 w10: AD1.2 6331,2695 6191,2835 ZU1.24 6063,2835 6063,2961 6080,2978 6160,2978 6291,2847 6602,2847 TP_A5.X
AD2: AD1.3 TP_A4.X ZU1.25 | length 1201.3
  Bottom Layer 1 w10: ZU1.25 6260,2795 AD1.3 7235,2795 TP_A4.X
AD3: AD1.4 TP_A3.X ZU1.26 | length 796.8
  Bottom Layer 1 w10: ZU1.26 6200,3035 6251,2984 6251,2960 6316,2895 AD1.4 6675,2895 TP_A3.X
AD4/SDA: AD1.5 IOH1.9 TP_A2.X TP_SDA1.X ZU1.27 | length 3439.5
  Bottom Layer 1 w10: IOH1.9 5159,2865 5357,3063 5547,3063 5573,3089 5924,3089 5970,3135 ZU1.27 6216,3135 6271,3080 6271,3040 6316,2995 AD1.5 6605,2995 6660,3050 7005,3050 TP_SDA1.X 7055,3260 7000,3315 TP_A2.X
AD5/SCL: AD1.6 IOH1.10 TP_A1.X TP_SCL1.X ZU1.28 | length 2542.4
  Bottom Layer 1 w10: TP_SCL1.X 4690,2965 IOH1.10 5000,2965 5053,3018 5053,3200 5106,3253 5645,3253 5711,3187 5922,3187 5970,3235 ZU1.28 6275,3235 AD1.6 6675,3095 TP_A1.X
AREF: C4.2 IOH1.8 TP_AREF1.X ZU1.21 | length 2991
  Top Layer 1 w10: C4.2 4728,2760 4733,2765 IOH1.8
  Bottom Layer 1 w10: IOH1.8 5598,2765 5678,2685 5863,2685 5959,2781 6216.71,2781 6346.71,2651 6624,2651 TP_AREF1.X 6438,2530 6433,2535 ZU1.21
AVCC: C8.2 L2.2 ZU1.20 | length 4507.1
  Top Layer 1 w10: C8.2 3465,2841 3496.69,2872.69 L2.2 3439,2975 3384,2920 3384,2165 3690,1859 5920,1859 5970,1909 5970,2365 6040,2435 ZU1.20
CMP: RN1.1 RN1.2 TP_CMP1.X U2.3 | length 5243.9
  Top Layer 1 w10: U2.3 2562.76,4943.24 v1(2921,4585) ; RN1.2 RN1.1 v1(6173.51,4220.51) 6173.51,4135.49 v1(6224,4085)
  Bottom Layer 1 w10: v1(2921,4585) 6029,4585 6295,4851 6344,4851 6355,4840 6355,4402 v1(6173.51,4220.51) ; v1(6224,4085) TP_CMP1.X
D+: RN3.5 TP_D+1.X X2.3 Z1.1 | length 1918.9
  Top Layer 1 w10: v1(1575.36,3421.93) Z1.1 ; RN3.5 v1(1759.61,3369.92)
  Bottom Layer 1 w10: v1(1575.36,3421.93) TP_D+1.X ; v1(1759.61,3369.92) TP_D+1.X ; X2.3 1811.62,3456.62 TP_D+1.X
D-: RN3.8 TP_D-1.X X2.2 Z2.1 | length 3049.8
  Top Layer 1 w10: v1(1399,2793) 1399,3095.18 Z2.1 1412.32,3293.26 1665.13,3293.26 RN3.8 v1(1665.13,3982.13)
  Bottom Layer 1 w10: TP_D-1.X 1399,2709.31 v1(1399,2793) ; v1(1665.13,3982.13) 2173,4490 X2.2
DTR: C5.1 RN4.4 TP_DTR1.X U4.13 | length 1306.2
  Top Layer 1 w10: RN4.4 5384.48,4902 5418,4902 5574.1,5058.1 v1(5611,5058.1)
  Bottom Layer 1 w10: v1(5611,5058.1) 6174.1,5058.1 6356,5240 6356,5358 6345,5369 TP_DTR1.X
GATE_CMD: T1.3 TP_GATE1.X U2.1 | length 3714.4
  Top Layer 1 w10: U2.1 2511.57,5040 2785.57,5314 v1(2916,5314) ; v1(5645,5274) 5645,5190 5655,5180 5699,5180 5737.5,5218.5 T1.3
  Bottom Layer 1 w10: v1(2916,5314) 2922.5,5320.5 5680.5,5320.5 ; v1(5645,5274) 5645,5285 5680.5,5320.5 ; TP_GATE1.X 5680.5,5320.5
GND: C1.1 C2.1 C3.1 C4.1 C6.2 C7.2 C8.1 C9.1 C10.2 GROUND1.1 ICSP1.6 ICSP2.6 IOH1.7 L1.C ON1.C PC1.- PC2.- POWER1.6 POWER1.7 RESET1.1 RESET1.2 RN1.7 RN4.5 U1.1 U2.4 U3.2 U4.3 U4.33 X1.1 X1.3 Y2.2 ZU1.8 ZU1.22 | length 18772.4
  Top Layer 1 w25: ON1.C 1040,2013.66 ; POWER1.6 1040,2013.66 ; U1.1 1789,3560 1999,3350 PC1.- 2030.51,2120.47 2102.98,2048 2185.55,2048 ICSP1.6 2325,1908.55 ; RESET1.1 RESET1.2 2607.13,1626.42 2325,1908.55 ; C8.1 3537,2670 3572,2705 C10.2 3750,2705 3755,2710 C1.1 3975,2710 3980,2705 C9.1 ; ICSP2.6 4013,2042 4013,2351 4095,2433 C9.1 ; L1.C 4949,4979.63 4949,3061 4965,3045 4965,2690 4940,2665 IOH1.7 4753,2665 4728,2690 C4.1 4462,2690 4447,2705 C2.1 C9.1 ; Y2.2 6032.88,5003.12 6135,4901 GROUND1.1 ; ZU1.22 6214,2635 6259,2680 6259,3058 6783,3582 6783,4160 6763,4180 6730,4180 6710,4160 U3.2 ; C3.1 6755,4535 6760,4540 C6.2 6760,4747 6780,4767 C7.2 ; 1040,2013.66 1040,2416.42 1080,2456.42 PC2.- 1791.62,2425 1756,2425 1741,2410 1741,2013 1967,1787 2280,1787 2325,1832 2325,1908.55
  Bottom Layer 1 w25: POWER1.7 POWER1.6 ; ICSP1.6 2353.93,1961.93 2372,1980 ICSP2.6 ; IOH1.7 5358,2665 5376,2647 5557,2647 5669,2535 ZU1.8 5870,2535 5970,2635 ZU1.22
IO0: IOL1.1 RN4.2 TP_17.X ZU1.2 | length 2108.9
  Top Layer 1 w10: RN4.2 5321.49,4853.51 5465,4710 IOL1.1 ; v1(5763,3312) 5763,3135 ZU1.2
  Bottom Layer 1 w10: IOL1.1 TP_17.X v1(5763,3312)
IO1: IOL1.2 RN4.1 TP_16.X ZU1.3 | length 2614.6
  Top Layer 1 w10: RN4.1 5290,4848 5400,4738 5400,3330 5420,3310 ; IOL1.2 5420,3310 ; v1(5636,3057) 5431,3057 5408,3080 5408,3300 5418,3310 5420,3310
  Bottom Layer 1 w10: TP_16.X 5330,3315 5335,3310 IOL1.2 ; v1(5636,3057) 5708,3057 5730,3035 ZU1.3
IO2: IOL1.3 TP_15.X ZU1.4 | length 765.9
  Top Layer 1 w10: IOL1.3 5652,3210 5702,3160 5702,2993 5760,2935 ZU1.4
  Bottom Layer 1 w10: TP_15.X 5368,3200 5378,3210 IOL1.3
IO3: IOL1.4 TP_14.X ZU1.5 | length 753.5
  Top Layer 1 w10: IOL1.4 5640,3110 5682,3068 5682,2880 5727,2835 ZU1.5
  Bottom Layer 1 w10: IOL1.4 5590,3110 TP_14.X
IO4: IOL1.5 TP_13.X ZU1.6 | length 590.2
  Bottom Layer 1 w10: IOL1.5 5552,3010 5557,3015 TP_13.X 5657,2998 5657,2798 5720,2735 ZU1.6
IO5: IOL1.6 TP_12.X ZU1.11 | length 1301.5
  Top Layer 1 w10: IOL1.6 5600,2910 5662,2848 5662,2280 5707,2235 ZU1.11
  Bottom Layer 1 w10: TP_12.X 5655,2225 5665,2235 ZU1.11
IO6: IOL1.7 TP_11.X ZU1.12 | length 1187.3
  Top Layer 1 w10: IOL1.7 5600,2810 5642,2768 5642,2200 5707,2135 ZU1.12
  Bottom Layer 1 w10: TP_11.X IOL1.7
IO7: IOL1.8 TP_10.X ZU1.13 | length 1328.6
  Top Layer 1 w10: IOL1.8 5465,2080 5510,2035 ZU1.13
  Bottom Layer 1 w10: TP_10.X ZU1.13
IO8: IOH1.1 TP_9.X ZU1.14 | length 1270.1
  Bottom Layer 1 w10: TP_9.X 4625,2065 IOH1.1 5025,1935 ZU1.14
IO9: IOH1.2 TP_8.X ZU1.15 | length 3421.5
  Bottom Layer 1 w10: IOH1.2 4940,2165 4952,2177 4952,2296 4940,2308 4572,2308 4559,2295 4559,1911 4600,1870 5994,1870 6059,1935 ZU1.15 6940,1935 TP_8.X
L13: RN2.8 TP_LCMD1.X U2.6 U2.7 | length 4411.2
  Top Layer 1 w10: U2.7 U2.6 v1(2562.76,5280) ; v1(6386,5250) 6386,5248.21 6408.21,5226 RN2.8
  Bottom Layer 1 w10: v1(2562.76,5280) 4292.37,5280 4312.87,5300.5 4372.87,5300.5 4429.37,5244 6289,5244 TP_LCMD1.X 6325,5308 6314,5319 6314,5431 6344,5461 6365,5461 6386,5440 v1(6386,5250)
M8RXD: RN4.7 TP_RX1.X U4.9 | length 1249.2
  Top Layer 1 w10: RN4.7 5321.49,4958.49 v1(5370,5007)
  Bottom Layer 1 w10: v1(5370,5007) 5357,5020 5260.66,5020 5240.66,5000 5240.66,4960 5360.66,4840 TP_RX1.X
M8TXD: RN4.8 TP_TX1.X U4.8 | length 4839
  Top Layer 1 w10: v1(5099,3590) 5099,4756 5280,4937 5290,4937 RN4.8
  Bottom Layer 1 w10: TP_TX1.X 2982.67,2716.93 3759.74,3494 5003,3494 v1(5099,3590)
MISO: ICSP2.1 IOH1.5 TP_5.X ZU1.18 | length 2099.7
  Top Layer 1 w10: ICSP2.1 4660,2465 IOH1.5
  Bottom Layer 1 w10: IOH1.5 5025,2465 5035,2455 TP_5.X 5332,2278 5877,2278 5920,2235 ZU1.18
MISO2: ICSP1.1 TP_MISO1.X U4.17 | length 219.7
  Bottom Layer 1 w10: TP_MISO1.X 2065,1750 2071.62,1756.62 ICSP1.1
MOSI: ICSP2.4 IOH1.4 TP_6.X ZU1.17 | length 2890.6
  Bottom Layer 1 w10: ICSP2.4 4225,2030 4225,2354 4236,2365 IOH1.4 4984,2365 5357,1992 5922,1992 5970,2040 5970,2080 6025,2135 ZU1.17 6298,2135 6308,2145 TP_6.X
MOSI2: ICSP1.4 TP_MOSI1.X U4.16 | length 293.6
  Bottom Layer 1 w10: ICSP1.4 2171.62,2236.62 TP_MOSI1.X
NetL1_A: L1.A RN2.1 TP_LL1.X | length 1490.6
  Top Layer 1 w10: L1.A 5301.45,5010 v1(5301.45,4990) ; RN2.1 6408.21,5029.79 v1(6421.5,5016.5)
  Bottom Layer 1 w10: v1(5301.45,4990) 5314.95,4976.5 6381.5,4976.5 TP_LL1.X v1(6421.5,5016.5)
NetON1_A: ON1.A RN2.5 RN2.6 TP_ONL1.X | length 8651
  Top Layer 1 w10: ON1.A 976,2562.34 ; v1(976,2664) 976,2562.34 ; v1(1273.66,2860) 976,2562.34 ; v1(6356,3975) 6356,5275 6361,5280 6431.2,5280 6471.2,5240 RN2.6 RN2.5
  Bottom Layer 1 w10: TP_ONL1.X v1(976,2664) ; v1(1273.66,2860) 2611,2860 2730,2741 2840,2741 2853,2754 2853,2871.82 2793.82,2931 2690.83,2931 2668.41,2953.42 2668.41,2960 2711.54,3003.13 3153.13,3003.13 3781,3631 4531,3631 4802,3902 6283,3902 v1(6356,3975)
NetRN2_7: RN2.7 RX1.A TP_RXL1.X | length 226.3
  Top Layer 1 w10: v1(2909.12,3239.43) RX1.A
  Bottom Layer 1 w10: TP_RXL1.X v1(2909.12,3239.43)
NetRN4_6: RN4.6 TP_TXL1.X TX1.A | length 4445.8
  Top Layer 1 w10: TX1.A 3234,3226.99 v1(3234,3416) ; RN4.6 5352.99,4961.7 5363.29,4972 5406,4972 5525,5091 5650,5091 5661,5080 5661,4929 5507,4775 v1(5507,3959)
  Bottom Layer 1 w10: v1(3234,3416) TP_TXL1.X 3387,3667 4527,3667 4819,3959 v1(5507,3959)
NetTP_USBVCC1_X: TP_USBVCC1.X U4.31
PB4: JP1.1 TP_PB3.X U4.18 | length 2316.1
  Top Layer 1 w10: v1(4190,2883) JP1.1
  Bottom Layer 1 w10: TP_PB3.X 3958.93,2651.93 v1(4190,2883)
PB5: JP1.3 TP_PB1.X U4.19 | length 2308.8
  Bottom Layer 1 w10: TP_PB1.X 2647,2946.55 2647,3204 3226,3783 4138,3783 JP1.3
PB6: JP1.2 TP_PB4.X U4.20 | length 801
  Top Layer 1 w10: JP1.2 4138,3783 v1(4138,4427)
  Bottom Layer 1 w10: TP_PB4.X v1(4138,4427)
PB7: JP1.4 TP_PB2.X U4.21 | length 1265
  Top Layer 1 w10: JP1.4 v1(4090,4710)
  Bottom Layer 1 w10: v1(4090,4710) TP_PB2.X
PWRIN: D1.A TP_PWRIN1.X X1.2 | length 4487.1
  Top Layer 1 w10: v1(5564,4672) 5630.22,4738.22 D1.A
  Bottom Layer 1 w10: TP_PWRIN1.X 1640,4226.57 2222.58,4809.15 2785.85,4809.15 2923,4672 v1(5564,4672)
RD+: RN3.4 U4.29
RD-: RN3.1 U4.30
RESET: C5.2 D3.A ICSP2.5 POWER1.3 RESET1.3 RESET1.4 RESET-EN1.1 RESET-EN1.2 RN1.4 TP_RESET1.X ZU1.1 | length 11934.2
  Top Layer 1 w10: RESET1.4 RESET1.3 ; v1(3365.35,2080) RESET1.3 ; D3.A 4283,5208.44 4283,5164 4260,5141 4157,5141 3364,4348 3364,1982.35 RESET1.3 ; ZU1.1 5820,4000 5860,4040 RESET-EN1.1 RESET-EN1.2 6267.99,4100 RN1.4
  Bottom Layer 1 w10: POWER1.3 1340,1969 1379,2008 2100,2008 2118,1990 2118,1938 2140,1916 2194,1916 2218,1940 2218,2048 2396.93,2226.93 TP_RESET1.X 2843.55,2080 v1(3365.35,2080) ICSP2.5 4075,2589 4939,3453 5814,3453 5820,3447 ZU1.1
RESET2: D2.A ICSP1.5 RN1.6 TP_RESET2.X U4.24 | length 3148.7
  Top Layer 1 w10: D2.A 4228,5208.44 4228,5240 4258,5270 v1(4343,5270) ; v1(4898,4034) v1(4898,4715) ; v1(5979,4339) 6217.5,4339 6236.5,4320 RN1.6
  Bottom Layer 1 w10: v1(4343,5270) v1(4898,4715) ; v1(4898,4034) 5674,4034 TP_RESET2.X v1(5979,4339)
RXLED: RX1.C U4.10
SCK: ICSP2.3 IOH1.6 TP_4.X U2.5 ZU1.19 | length 8139.4
  Top Layer 1 w10: U2.5 2588.35,5252.35 2708,5372 2946,5372 3277,5041 3277,2082 v1(3325,2034)
  Bottom Layer 1 w10: v1(3325,2034) 4129,2034 ICSP2.3 4175,2520 4220,2565 IOH1.6 5600,2565 5780,2385 5920,2385 5970,2335 ZU1.19 TP_4.X
SCK2: ICSP1.3 TP_SCK1.X U4.15 | length 1159.4
  Top Layer 1 w10: v1(2038,2038) 2070,2038 2122,1986 2122,1911.55 ICSP1.3
  Bottom Layer 1 w10: v1(2038,2038) 2098,2038 2148,2088 2148,2360 2328,2540 TP_SCK1.X
SS: IOH1.3 TP_7.X ZU1.16 | length 2746
  Bottom Layer 1 w10: IOH1.3 4640,2265 4579,2204 4579,1951 4638,1892 5922,1892 6065,2035 ZU1.16 6383,2035 6388,2030 TP_7.X
TP_VUCAP: C11.1 TP_VUCAP1.X U4.27
TXLED: TX1.C U4.11
UGND: C11.2 GROUND1.2 L3.1 TP_UGND1.X U4.28 X2.4 | length 6532
  Top Layer 1 w10: L3.1 2496,3073.62 ; v1(2717.62,2964) 2608,3073.62 2496,3073.62 ; X2.4 2795.58,4539 2720,4539 2675,4494 2675,3252.62 2496,3073.62 ; v1(5666,3545) 5666,4047 5949,4330 5949,4440 5974,4465 GROUND1.2
  Bottom Layer 1 w10: v1(2717.62,2964) 3151,2964 3736,3549 4754,3549 4825,3620 5120,3620 5140,3600 TP_UGND1.X v1(5666,3545)
USBVCC: F1.1 T1.1 | length 1338.2
  Top Layer 1 w10: F1.1 4866.77,5069.77 5067,5270 5200,5270 5223,5247 5223,5121 5233,5111 5609,5111 5636.5,5138.5 T1.1
USHIELD: L3.2 TP_USH1.X X2.P$1 X2.P$2 Z1.2 Z2.2 | length 4965.7
  Top Layer 1 w10: Z2.2 1462,3421.68 1462,3437.31 Z1.2 1542.38,3517.69 1601.31,3517.69 1619,3500 v1(1619,3339) ; L3.2 2331,3150 2331,3040 2437,2934 2747.62,2934 2792,2978.38 2792,4143.3 X2.P$1 X2.P$2
  Bottom Layer 1 w10: v1(1619,3339) 2169,3339 TP_USH1.X 2830,4181.3 X2.P$1
VIN: D1.C PC1.+ POWER1.8 RN1.8 TP_VIN1.X U1.3 | length 10857.3
  Top Layer 1 w10: U1.3 1971,3598 2219,3350 PC1.+ v1(2326,3350) 2258,3282 ; v1(5780,4289) v1(5780,4369) D1.C ; v1(6123,4302) 6173.51,4302 RN1.8
  Bottom Layer 1 w10: POWER1.8 840,2680 749,2771 749,2906 1125,3282 2258,3282 ; TP_VIN1.X 2337.93,3361.93 v1(2326,3350) 2258,3282 ; v1(5780,4289) 5563,4072 3473,4072 2344,2943 1800,2943 1763,2980 1763,3160 1803,3200 2176,3200 2258,3282 ; v1(5780,4369) 6080.98,4369 6123,4326.98 v1(6123,4302)
XT1: C7.1 R1.1 TP_XT2.X U4.1 Y1.2 | length 5467.2
  Top Layer 1 w10: R1.1 6587,4800 6647,4860 C7.1
  Bottom Layer 1 w10: Y1.2 2299.93,3011.93 3391,4103 4438,4103 4836,4501 6001,4501 TP_XT2.X
XT2: C6.1 R1.2 TP_XT4.X U4.2 Y1.1 | length 6320.7
  Bottom Layer 1 w10: Y1.1 1939.55,2684 2986,2684 3776,3474 6089,3474 TP_XT4.X
XTAL1: R2.1 TP_XT3.X Y2.3 ZU1.9 | length 5004.6
  Top Layer 1 w10: v1(5145,4149) 5145,3046 5438,2753 5522,2753 5606,2669 5606,2160 5674,2092 5863,2092 5896,2125 5896,2420 5881,2435 ZU1.9 ; v1(5981,4414) 6160,4414 6173,4427 6173,4902 6072.25,5002.75 Y2.3
  Bottom Layer 1 w10: v1(5145,4149) 5145,4175 TP_XT3.X 5165,4360 5219,4414 v1(5981,4414)
XTAL2: R2.2 TP_XT1.X Y2.1 ZU1.10 | length 3754.1
  Top Layer 1 w10: ZU1.10 5763,2335 5763,2661 5780,2678 5855,2678 5877,2700 5877,3060 5852,3085 5760,3085 5733,3112 5733,3315 5634,3414 v1(5634,4300) 5634,4595 5685,4646 5884.51,4646 5993.51,4755 Y2.1
  Bottom Layer 1 w10: TP_XT1.X v1(5634,4300)
XUSB: F1.2 TP_XUSB1.X X2.1 | length 2378.6
  Top Layer 1 w10: v1(4713.23,4483) F1.2
  Bottom Layer 1 w10: X2.1 2814.68,4540 4605,4540 TP_XUSB1.X 4705,4474.77 v1(4713.23,4483)
pads on no net: FD1.P$1 FD2.P$1 FD3.P$1 ORIGIN1.X POWER1.1 RESET1.5 RN3.2 RN3.3 RN3.6 RN3.7 U3.4 U4.5 U4.6 U4.7 U4.12 U4.14 U4.22 U4.23 U4.25 U4.26 X1.4 X1.5 X1.6 X1.7 X1.8 X1.9
copper on no net: | length 567.1
  Top Layer 1 w10: 1075,4225 1255,4225 1260,4220 1640,4220

## Polygon pours and split planes (outlines as drawn)
no net on Top Layer (split plane): 7464.9,5001.68 7464.9,1268.32 6996.68,800.1 858.32,800.1 545.1,1113.32 545.1,5091.68 963.32,5509.9 6956.68,5509.9
no net on Bottom Layer (split plane): 7464.9,5001.68 7464.9,1268.32 6996.68,800.1 858.32,800.1 545.1,1113.32 545.1,5091.68 963.32,5509.9 6956.68,5509.9

## Text inside footprints (layer, text, board x,y; h text height)
U1: Mechanical 7 "2" at 1829.19,4892.62 h49.6; Mechanical 7 "1" at 1744.07,4892.99 h49.6; Mechanical 7 "4" at 1955,5162.99 h49.6; Mechanical 7 "3" at 1920.19,4892.99 h49.6
U4: Mechanical 7 "1" at 2338.11,2840.2 h49.6